# EAGLE board Camera (EAGLE 7.3.0)
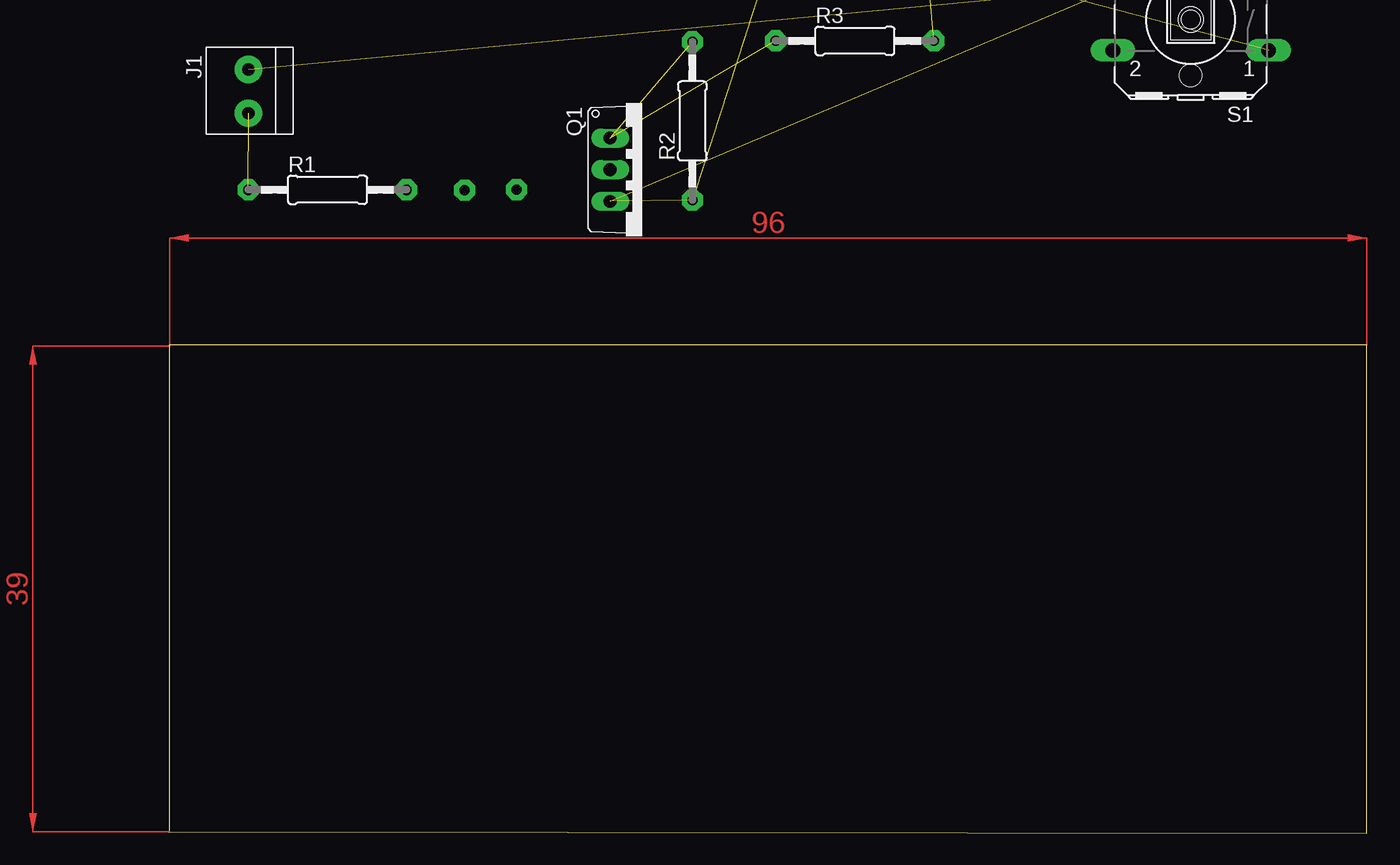
[diagram p0: board, top side]

Size 96.1 x 39.2 mm. Coordinates in mm from the lower left corner, seen from the top.
Outline: 0.1,0.2 0.1,39.2 96.1,39.2 96.1,0 0,0.1
Copper layers (1*16): Top 0.035mm / dielectric 1.5mm / Bottom 0.035mm
Design rules "default": minimum track width 10mil, minimum drill 24mil, track to track 8mil, track to pad 8mil, pad to pad 8mil, via to via 8mil, smd to smd 8mil, copper to edge 40mil, drill to drill 8mil, minimum pad ring 10mil, minimum via ring 8mil, stop-mask expansion 4mil, vias tented up to drill 0mil, thermal gap 10mil

## Footprints (pad centres in the part's own frame; a part is rotated, then mirrored left to right if it is on the bottom)
DO35Z10 = drill 0.813 long: A 5.08,0; C -5.08,0
1X2-3.5MM = drill 1 pad 2.184: 1 1.8,0; 2 -1.7,0
TO220V = drill 1.016 long: 1 -2.54,-2.54; 2 0,-2.54; 3 2.54,-2.54
0207/12 = drill 0.813 pad 1.676 octagon: 1 -6.35,0; 2 6.35,0
B3F-40XX = drill 1.194 long: 1 -6.248,2.489; 2 6.248,2.489; 3 -6.248,-2.489; 4 6.248,-2.489 | hole 1.803: 0,-4.496; 0,4.496

## Placement (x,y rotation side)
D1  [DO35Z10]  55.24,76.23 0 top  (outside the outline)
J1  1X2-3.5MM  [1X2-3.5MM]  6.4,59.47 90 top  (outside the outline)
Q1  [TO220V]  37.95,53.24 270 top  (outside the outline)
R1  [0207/12]  12.74,51.62 0 top  (outside the outline)
R2  [0207/12]  42.01,57.14 90 top  (outside the outline)
R3  [0207/12]  55.04,63.57 0 top  (outside the outline)
R4  [0207/12]  38.84,74.25 0 top  (outside the outline)
S1  [B3F-40XX]  81.98,65.29 180 top  (outside the outline)

## Library data of the parts
D1 = diode
J1 Q1 R1-R4 = adafruit
S1 = switch-omron; MF: OMRON COMPONENTS USA; MPN: B3F-4000; OC_FARNELL: 176434; OC_NEWARK: 36K3105

## Nets
N$1: R1.2
N$3: J1.2 R1.1
N$4: D1.A R3.2
N$5: R4.2 S1.1
N$7: Q1.1 R2.2 R3.1
N$8: D1.C J1.1 Q1.3 R2.1 S1.4
N$11: Q1.2

## Tracks (layer width: path | path; a pad name or v marks a point on that pad's centre or on a via)
N$3  (1 unrouted)
N$4  (1 unrouted)
N$5  (1 unrouted)
N$6  (via drill 0.8 pad 1.68)
  other vias: 23.75,51.6
N$7  (2 unrouted)
N$8  (4 unrouted)
N$10  (via drill 0.8 pad 1.68)
  other vias: 27.9,51.65
N$15
  Top 0.85: 42.1,63.5 42.2,63.5
(copper drawn outside any net)
  shapes: Top area x2